# Altium PCB FinalPCB.PcbDoc (part 2 of 2)
Units mil, origin at the board's own origin, x right, y up, seen from the top; angles counter-clockwise.
Board outline 1128 x 1200 mil, 4 copper layers (Top Layer, Layer 1, Layer 2, Bottom Layer), stack 23.756 mil thick; 37 components, 46 nets, 236 pads, 59 vias.
Unrouted connection lines stored in the file: 12.
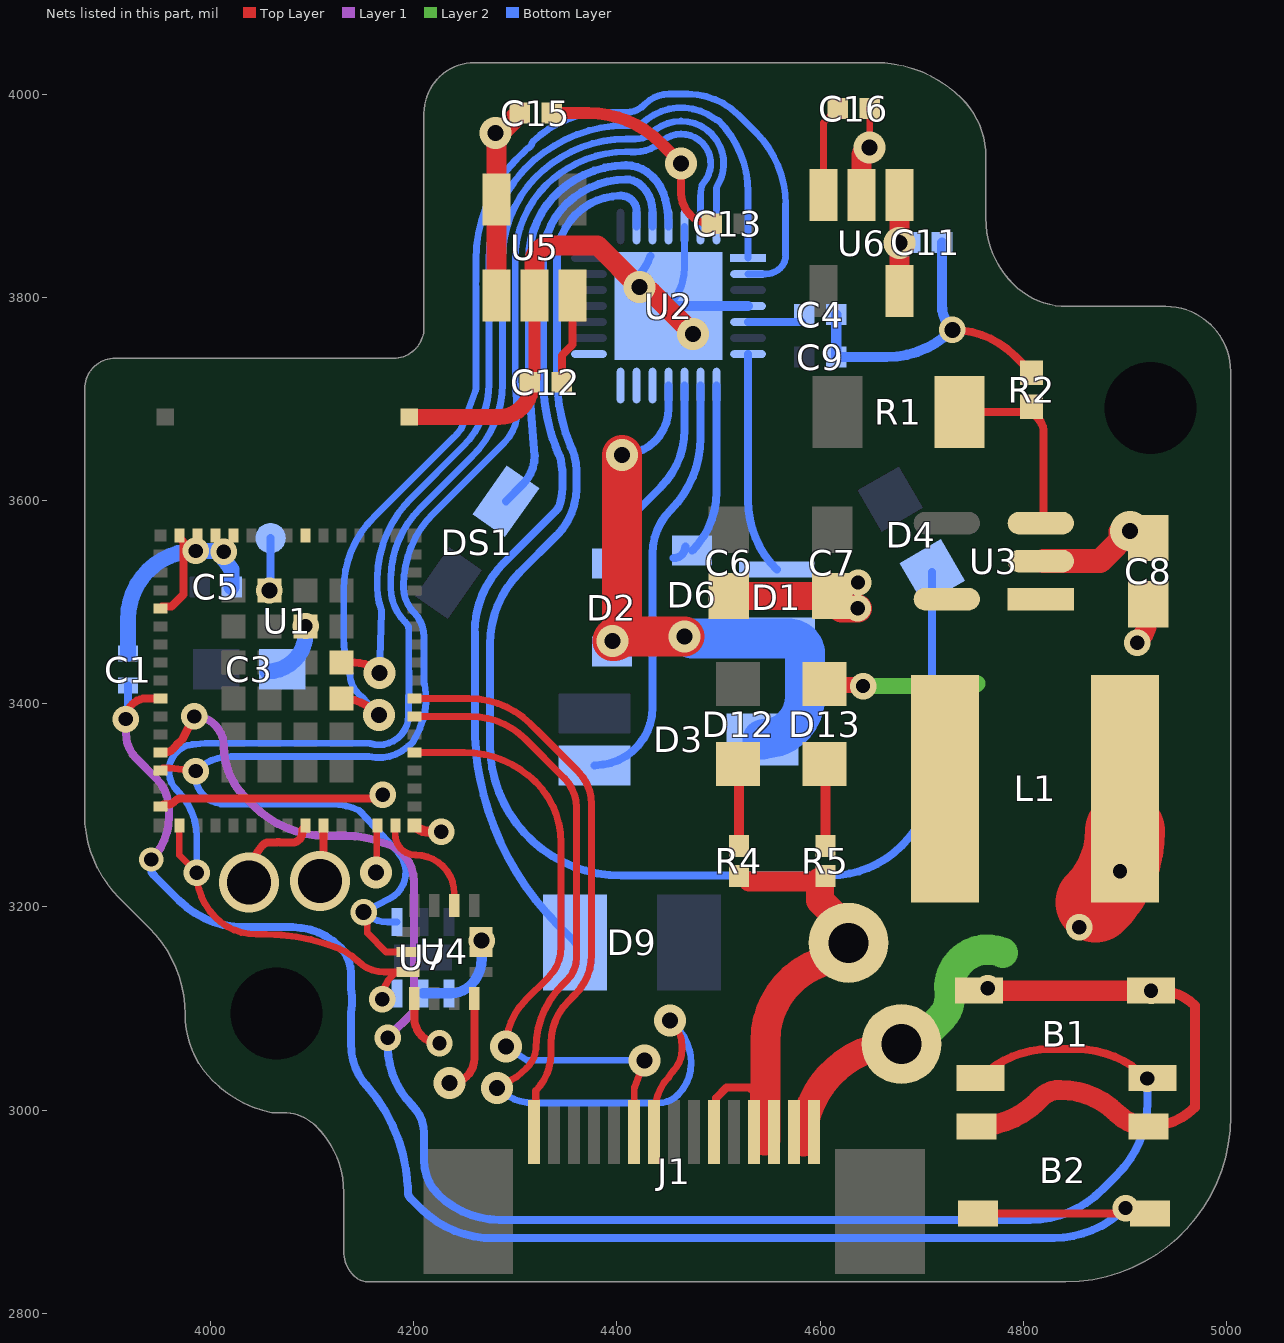
[diagram p4: the nets of this part, all layers, seen from the top]

## Via types
v1: diameter 26, hole 14, Top Layer to Bottom Layer, tented top, 22 vias
v2: diameter 31.5, hole 15.75, Top Layer to Bottom Layer, tented top, 16 vias
v3: diameter 26, hole 14, Top Layer to Bottom Layer, 5 vias
v4: diameter 26, hole 14, Top Layer to Bottom Layer, tented both sides, 4 vias
v5: diameter 31.5, hole 15.75, Top Layer to Bottom Layer, tented both sides, 3 vias
v6: diameter 26, hole 15.75, Top Layer to Bottom Layer, tented top, 3 vias
v7: diameter 59.06, hole 43.31, Top Layer to Bottom Layer, tented top, 2 vias
v8: diameter 59.06, hole 39.37, Top Layer to Bottom Layer, tented top, 1 vias
v9: diameter 24, hole 14, Top Layer to Bottom Layer, tented top, 1 vias
v10: diameter 26, hole 15.75, Top Layer to Bottom Layer, 1 vias
v11: diameter 39.37, hole 15.75, Top Layer to Bottom Layer, tented top, 1 vias

## Nets (pads, with @x,y where several pads share a name; then routed paths per layer and width w, separated by ;. In a path a pad name is that pad's centre, name@x,y a point inside that pad or via, vN(x,y) a via of type N, cw(c..) or ccw(c..) an arc to the next point about the centre after c; other vN are vias at no path point) (continued)
GND: B1.1 B1.2 B2.1 B2.2 C1.2 C3.2 C4.2 C5.2 C6.2 C7.2 C8.2 C9.2 C11.2 C12.2 C13.2 C15.2 C16.2 J1.10 J1.12 J1.13 pad.10@4627.85,3164.72 R2.2 R4.1 R5.1 U1.5 U1.16 U1.31 U1.57 U1.58 U1.59 U1.60 U1.84 U1.86 U2.4 U2.26 U2.29 U3.2 U4.1 U4.6 U4.7 U5.2 U6.2 U7.4 U7.5 | length 3359.8
  Top Layer w6.69: U6.2@4640.69,3900.61 U6.2@4648.75,3908.67 ; v2(4648.75,3947.24) C16.2@4648.75,3985.81
  Top Layer w7.87: U1.16@3950.46,3298.85 3953.41,3300.74 3957.35,3300.74 ccw(c3957.35,3310.66) 3964.79,3304.09 cw(c3970.66,3298.84) 3970.62,3306.71 v1@4169.4,3306.71 ; U1.5@3950.46,3493.73 3952.35,3495.62 3961.46,3495.62 3973.45,3507.61 3973.45,3559.32 3969.16,3563.61 U1.60@3969.16,3565.58 ; U4.1@4200.52,3109.89 4200.52,3090.54 ccw(c4225.29,3090.54) v1(4225.29,3065.77) ; v2(4463.22,3931.62) 4463.22,3902.37 ccw(c4493.27,3902.37) C13.2@4493.27,3872.32 ; J1.10@4495.64,2978.25 4497.61,2980.22 4497.61,3011.97 4507.87,3022.23 4530.4,3022.23 4535.01,3017.62 J1.12@4535.01,2978.25 ; v6(4730,3768) cw(c4730,3681.4) 4791.24,3742.63 R2.2@4808,3725.87
  Top Layer w9.84: v11(4905,3570) C8.2@4906.38,3570
  Top Layer w10: U1.31@4200.46,3280.15 ccw(c4215.3,3294.99) 4215.3,3274 v1(4227,3274) ; B2.2@4923.29,2983.92 ccw(c4923.29,3048.57) 4969,3002.86 4969,3102.79 ccw(c4933.46,3067.25) 4933.46,3117.51 v1(4925.72,3117.51)
  Top Layer w11.81: C12.2@4315.75,3714.23 ccw(c4307.95,3722.04) 4318.98,3722.04 U5.2@4318.98,3801.58 ; C15.2@4335.75,3981.28 4372.14,3981.28 cw(c4372.14,3881.28) 4442.85,3951.99 v2(4463.22,3931.62) ; v11(4905,3570) C8.2@4907.07,3572.07
  Top Layer w15.75: U1.86@4195.54,3682.12 4283.63,3682.12 ccw(c4283.63,3714.23) C12.2@4315.75,3714.23 ; v11@4891.46,3556.46 v11@4891.46,3570
  Top Layer w19.68: U5.2@4318.98,3801.58 4319,3836 cw(c4334,3836) 4334,3851 4381,3851 v2(4422,3810) cw(c4422,3793.1) 4433.94,3805.06 v2(4475,3764) ; 4530,3225 R5.1@4600,3225 ; U6.2@4640.69,3900.61 4640.69,3939.18 cw(c4648.75,3939.18) v2(4648.75,3947.24) ; B2.1@4754,2983.92 ccw(c4754,3068.24) 4813.62,3008.62 4817.08,3012.08 cw(c4836.2,2992.97) 4836.2,3020 cw(c4836.2,2940.8) 4892.2,2996.8 ccw(c4923.29,3027.9) B2.2@4923.29,2983.92
  Top Layer w20: B1.1@4756.43,3117.51 v1(4925.72,3117.51)
  Top Layer w23.62: U3.2@4819.97,3540.25 4875.25,3540.25 v11@4891.46,3556.46
  Top Layer w27.56: C6.2@4510,3505.96 C7.2@4611.67,3505.96 4611.67,3503.09 4620.84,3493.91 v1(4636.99,3493.91) ; R5.1@4600,3225 4600,3206.42 4627.85,3178.57 pad.10@4627.85,3164.72
  Top Layer w29.53: 4545,2970 ccw(c4545,2971) 4546,2971 4546,3068.18 cw(c4627.85,3068.18) 4607.93,3147.57 ccw(c4600.64,3176.19) pad.10@4627.85,3164.72
  Bottom Layer w7: U2.29@4450.73,3791.4 ccw(c4412.71,3829.41) 4466.48,3829.41 U2.26@4466.48,3869.68
  Bottom Layer w7.87: U2.29@4420,3820 ccw(c4381.98,3858.02) U2.29@4432.85,3840.59
  Bottom Layer w10: U7.5@4209,3114.96 U7.4@4234.59,3114.96 4236.59,3114.96 ccw(c4236.59,3142.41) 4256,3123 ccw(c4229.82,3149.18) 4266.84,3149.18 v6(4266.84,3166.72) ; U2.29@4450.73,3791.4 U2.4@4529.02,3791.4 ; C4.2@4615.75,3782.99 C9.2@4615.75,3741.15 4665.17,3741.15 ccw(c4665.17,3832.83) v6(4730,3768) cw(c4754.75,3792.75) 4719.75,3792.75 C11.2@4719.75,3854
  Bottom Layer w15.75: C1.2@3918.87,3449.21 3918.87,3483.91 cw(c3985.32,3483.91) v4(3985.32,3550.36) 4012.19,3550.36 cw(c4012.19,3549.51) v4(4013.03,3549.51) 4013.03,3542.12 4020.71,3531.98 cw(c4013.03,3531.25) 4020.75,3531.25 C5.2@4020.75,3515 ; C3.2@4056.17,3431.87 ccw(c4056.17,3469.16) 4093.46,3469.16 v3(4093.46,3476.47)
  Bottom Layer w27.56: v11@4905,3563.61 v11(4905,3570)
  other v1: 4765,3120 4169.45,3310.38 4637.28,3519.28
GPIO0: U1.72 U2.1 | length 935.8
  Top Layer w7.87: U1.72@4128.61,3440.58 4140.95,3440.58 cw(c4140.95,3404.91) v2(4166.17,3430.13)
  Bottom Layer w6.69: v2(4166.17,3430.13) 4168.33,3490.1 ccw(c4160.46,3490.41) 4167.85,3493.14 cw(c4224.14,3514.14) 4164.06,3514.14 4164.06,3522.32 cw(c4239.89,3522.32) 4164.07,3523.85 cw(c4277.32,3521.99) 4178.96,3578.16 cw(c4277.32,3521.99) 4197.22,3602.08 4248.54,3653.39 ccw(c4187.21,3714.72) 4272.54,3699.18 ccw(c4187.21,3714.72) 4273.94,3714.72 4273.94,3810.05 ccw(c4266.07,3810.01) 4273.87,3811.1 cw(c4287,3813) 4273.87,3814.91 ccw(c4266.07,3815.99) 4273.94,3815.95 4273.94,3836.96 cw(c4404,3837) 4298.53,3913.1 ccw(c4292.12,3917.67) 4298.58,3913.17 cw(c4381,3856.54) 4310.26,3927.21 4318.76,3935.72 ccw(c4315.73,3942.99) 4320.74,3936.91 cw(c4404,3837) 4337.85,3948.98 4338.14,3949.16 cw(c4409,3833.92) 4409,3969.2 cw(c4409,3894.27) 4414.6,3968.99 ccw(c4415.14,3976.84) 4416.63,3969.11 4421.81,3970.14 ccw(c4420.22,3977.85) 4422.96,3970.47 cw(c4427.68,3958.07) 4423.39,3970.62 ccw(c4420.78,3978.05) 4426.06,3972.22 cw(c4463.22,3931.62) 4427.05,3973.1 ccw(c4421.84,3979) 4427.14,3973.18 cw(c4444.75,3954.12) 4429.48,3975.1 ccw(c4424.81,3981.44) 4429.58,3975.18 cw(c4463.22,3931.62) 4496.14,3975.73 ccw(c4500.81,3982.07) 4499.73,3974.27 cw(c4429.02,3903.56) 4529.02,3903.56 U2.1@4529.02,3838.64
GPIO1: U1.71 U2.2 | length 1101.4
  Top Layer w7.87: U1.71@4128.61,3405.15 cw(c4128.61,3355.37) 4163.81,3390.57 v2(4165.74,3388.64)
  Bottom Layer w6.69: v2(4165.74,3388.64) 4160.23,3394.14 cw(c4231,3464.8) 4150.94,3404.88 ccw(c4145.59,3400.85) 4149.46,3406.32 cw(c4166.17,3430.13) 4137.08,3429.47 ccw(c4130.39,3429.28) 4136.72,3431.47 cw(c4231,3464.8) 4131,3464.8 4131,3512.36 cw(c4231,3512.36) 4160.29,3583.07 4239.54,3662.32 ccw(c4187.21,3714.72) 4246.15,3669.89 ccw(c4240.81,3673.92) 4247.07,3671.55 4260.7,3708.11 ccw(c4254.44,3710.48) 4261.12,3709.98 ccw(c4187.21,3714.72) 4261.27,3714.72 4261.27,3809.32 ccw(c4254.57,3809.28) 4261.23,3810.01 cw(c4287,3813) 4261.23,3815.99 ccw(c4254.57,3816.72) 4261.27,3816.68 4261.27,3836.92 cw(c4404,3837) 4288.17,3920.41 ccw(c4282.72,3924.29) 4288.21,3920.46 cw(c4381,3856.54) 4301.33,3936.22 4309.76,3944.64 cw(c4318.76,3935.72) 4312.69,3946.85 ccw(c4309.44,3952.7) 4313.65,3947.49 cw(c4404,3837) 4314.22,3947.96 ccw(c4309.98,3953.14) 4316.66,3952.66 cw(c4387.37,3881.95) 4387.37,3981.95 4409.1,3981.95 ccw(c4409.1,4006.74) 4426.63,3989.21 4427.76,3990.34 cw(c4451.09,3967.01) 4451.09,4000 4470,4000 cw(c4470,3929.99) 4519.51,3979.49 4536.71,3962.29 cw(c4466,3891.58) 4566,3891.58 4566,3841.07 cw(c4548.93,3841.07) 4561,3829 cw(c4546.25,3843.75) 4546.25,3822.89 U2.2@4529.02,3822.89
I2C3_SCL: U1.14 U2. U4.13 U7.1 | length 1549.2
  Top Layer w6.69: U1.14@3950.46,3334.28 3952.94,3336.76 3958.9,3336.76 cw(c3958.89,3330.07) 3959.69,3336.71 v1(3985.28,3333.65) ; v6(4150.57,3194.91) 4154.27,3191.21 4154.27,3174.16 4172.77,3155.66 U4.13@4194.12,3155.66
  Bottom Layer w6.69: v1@3987.64,3330.73 v1@3985,3333.37 ; U7.1@4183.41,3185.04 4174.39,3185.04 cw(c4174.39,3218.73) v6(4150.57,3194.91) 4176.3,3208.12 ccw(c4163,3234) 4184.38,3253.74 4147.36,3293.83 ccw(c4142.44,3289.29) 4147.17,3294.02 4146.35,3294.84 ccw(c4119.54,3239.54) 4119.54,3301 4014.73,3301 cw(c4014.73,3331.73) 3993,3310 cw(c4012.31,3329.31) 3985,3329.31 v1@3985,3333.37 ; 4301.94,3687.89 cw(c4258.6,3687.89) 4289.25,3657.24 4260.7,3628.7 4219.29,3587.28 ccw(c4290,3516.57) 4190,3516.57 4190,3514.14 ccw(c4224.14,3514.14) 4200,3490 cw(c4175.86,3465.86) 4210,3465.86 4210,3420.53 ccw(c4212.43,3420.53) 4210.71,3418.81 cw(c4136.93,3404.96) 4202.18,3367.85 4199.11,3362.48 cw(c4193.28,3365.78) 4197.34,3360.46 4194.51,3358.3 ccw(c4198.52,3352.94) 4194,3357.87 cw(c4165.74,3388.64) 4155.76,3348.08 4020.1,3348.08 ccw(c4020.1,3298.84) v1(3985.28,3333.65) v1@3985,3333.37 ; 4301.94,3687.93 4301.69,3690.89 4301.03,3698.75 ccw(c4294.36,3698.25) 4301.02,3698.9 4300.99,3699.21 cw(c4521.76,3721.24) 4299.89,3721.32 4299.89,3837 cw(c4404,3837) 4330.89,3911.12 cw(c4404,3837) 4351.25,3926.76 ccw(c4347.83,3932.51) 4351.32,3926.8 cw(c4409,3833.92) 4409,3943.25 cw(c4409,3894.27) 4413.69,3943.03 ccw(c4414.29,3949.69) 4414.26,3943 4417.89,3943 ccw(c4417.89,3980.98) 4442.39,3951.96 ccw(c4438.04,3957.05) 4442.73,3952.27 cw(c4463.22,3931.62) 4444.39,3953.79 ccw(c4440.02,3958.87) 4444.75,3954.12 ccw(c4441.02,3959.68) 4445.14,3954.41 cw(c4463.22,3931.62) 4484.94,3912.26 ccw(c4489.96,3907.83) 4483.44,3909.33 ccw(c4532.66,3898.34) 4482.23,3898.34 U2.@4482.23,3869.68
I2C3_SDA: U1.18 U2.28 U4.14 U7.6 | length 1579.8
  Top Layer w6.69: U1.18@3969.16,3280.15 3969.16,3250.9 v1(3986.35,3233.71) ccw(c4048.5,3233.71) 4004.53,3189.79 ccw(c4045.03,3230.24) 4045.03,3173 4054.72,3173 cw(c4054.75,2984.07) 4127.05,3158.62 cw(c4106.36,3108.66) 4144.63,3146.87 ccw(c4170.97,3173.26) 4170.97,3135.97 4182.55,3135.97 ; v1(4169,3109) cw(c4201.42,3109) 4178.5,3131.93 4182.55,3135.97 ; U4.14@4194.12,3135.97 4182.55,3135.97
  Bottom Layer w6.69: v1(3986.35,3233.71) 3986.35,3268.99 ccw(c3922.83,3268.99) 3967.75,3313.91 ccw(c3962.59,3309.64) 3967.2,3314.49 cw(c3985.28,3333.65) 3972.43,3356.65 ccw(c3969.13,3362.48) 3973.32,3357.26 cw(c3978.69,3350.65) 3978.69,3359.16 3978.84,3359.2 cw(c3985,3335.86) 3985,3360 3994.81,3361.11 4155.31,3361.11 cw(c4155.27,3354.41) 4157.2,3360.82 ccw(c4165.74,3388.64) 4165.74,3359.54 ccw(c4165.74,3388.64) 4194.83,3388.33 4195.26,3429.83 ccw(c4166.17,3430.13) 4195.03,3433.86 cw(c4201.67,3434.67) 4194.98,3434.64 4194.98,3473.86 ccw(c4188.28,3473.85) 4193.93,3477.44 ccw(c4175.86,3465.86) 4191.06,3481.02 cw(c4224.14,3514.14) 4187.89,3484.51 cw(c4224.14,3514.14) 4177.32,3514.14 4177.32,3522.32 cw(c4239.89,3522.32) 4177.33,3523.55 cw(c4277.32,3521.99) 4206.61,3592.7 4257.92,3644.01 ccw(c4187.21,3714.72) 4287.21,3714.72 4287.21,3814.64 ; 4287,3813 ccw(c4280.52,3814.67) 4287.21,3814.64 ; U2.28@4497.98,3869.68 4497.98,3906.53 cw(c4504.67,3906.5) 4498.93,3909.94 ccw(c4463.22,3931.62) 4437.54,3964.56 cw(c4433.47,3969.87) 4437.4,3964.45 ccw(c4444.75,3954.12) 4436.06,3963.35 cw(c4431.5,3968.26) 4435.9,3963.22 ccw(c4463.22,3931.62) 4434.35,3961.81 cw(c4429.76,3966.68) 4433.61,3961.2 4430.74,3959.21 cw(c4426.95,3964.72) 4427.68,3958.07 cw(c4423.38,3963.2) 4425.4,3956.82 cw(c4417.89,3980.98) 4417.89,3955.68 4414.83,3955.68 cw(c4414.86,3962.37) 4414.33,3955.7 ccw(c4409,3894.27) 4409,3955.93 ccw(c4409,3833.92) 4344.76,3937.65 cw(c4341.27,3943.36) 4344.7,3937.61 ccw(c4404,3837) 4287.21,3837 4287.21,3814.64
LEDX1: D9.1 U2.24 | length 920
  Bottom Layer w7.87: D9.1@4358.9,3165.17 4344.14,3179.93 4341.87,3182.2 cw(c4539.62,3379.89) 4265.2,3326.22 ccw(c4257.48,3324.67) 4265.14,3326.49 cw(c4404.38,3360.1) 4261.35,3352.4 ccw(c4253.49,3351.93) 4261.33,3352.69 4261.16,3354.46 cw(c4269,3355.2) 4261.15,3354.52 4261.11,3354.97 cw(c4539.62,3379.89) 4260,3379.98 4260,3470 cw(c4356.57,3470) 4288.28,3538.28 4339.77,3589.77 ccw(c4326.11,3603.43) 4342.24,3592.79 ccw(c4335.65,3597.1) 4343.01,3594.3 ccw(c4294.95,3611.94) 4345.43,3603.43 ccw(c4294.95,3611.94) 4346.14,3611.94 4346.14,3629.54 ccw(c4305.64,3629.61) 4346.14,3630.14 ccw(c4338.27,3630.01) 4346.07,3631.08 4345.06,3638.7 ccw(c4337.25,3637.69) 4344.9,3639.57 ccw(c4305.64,3629.61) 4343.69,3643.5 ccw(c4336.3,3640.77) 4343,3644.91 cw(c4361.59,3656.17) 4341.57,3647.71 4341.51,3647.84 cw(c4521.76,3721.24) 4339.51,3652.96 cw(c4521.76,3721.24) 4334.86,3666.96 cw(c4521.76,3721.24) 4327.14,3721.32 4327.14,3837 cw(c4404,3837) 4344.79,3886 cw(c4404,3837) 4365.31,3903.41 ccw(c4361.31,3910.19) 4365.45,3903.5 cw(c4409,3833.92) 4409,3916 cw(c4409,3894.27) 4424.36,3909.64 4425,3909 cw(c4400.9,3884.9) 4434.98,3884.9 U2.24@4434.98,3869.68
LEDX2: DS1.2 U2.25 | length 478.1
  Bottom Layer w8: DS1.2@4290.61,3599.31 4307.48,3616.18 ccw(c4279.66,3644) 4319,3644 ; 4319,3644.04 4314.3,3699.98 ccw(c4306.33,3699.34) 4314.29,3700.12 4314.27,3700.34 cw(c4521.76,3721.24) 4313.22,3721.32 4313.22,3837 cw(c4404,3837) 4337.41,3898.7 cw(c4404,3837) 4358.12,3915.33 ccw(c4354.05,3922.22) 4358.25,3915.41 cw(c4409,3833.92) 4409,3929.92 cw(c4409,3894.27) 4434.24,3919.44 4434.8,3918.89 cw(c4400.9,3884.9) 4447.48,3896.52 ccw(c4455.23,3898.51) 4447.52,3896.37 cw(c4366.29,3873.29) 4450.73,3873.29 U2.25@4450.73,3869.68
LEDX3: D4.1 U2.23 | length 1410.3
  Bottom Layer w7.87: 4341,3721.24 ccw(c4521.76,3721.24) 4354.31,3653.16 ccw(c4361.59,3656.17) 4354.89,3652.03 4355.47,3651.1 cw(c4348.77,3646.95) 4356.08,3649.89 cw(c4305.64,3629.61) 4360,3629.61 4360,3611.94 cw(c4294.95,3611.94) 4340.95,3565.95 4304.29,3529.29 ccw(c4375,3458.58) 4275,3458.58 4275,3360.1 ccw(c4404.38,3360.1) 4404.38,3230.71 4609.29,3230.71 ccw(c4609.29,3330.71) 4680,3260 4680.98,3260.98 ccw(c4610.27,3331.69) 4710.27,3331.69 D4.1@4710.27,3529.77 ; 4341,3721.28 4341,3837 cw(c4404,3837) 4404,3900 cw(c4404,3884.76) 4419.24,3884.76 U2.23@4419.24,3869.68
LX: L1.1 U3.5
MPUInt1: U1.29 U4.4 | length 145.5
  Top Layer w6.69: v2(4163,3234) 4163.52,3234.52 4163.52,3279.62 U1.29@4164.04,3280.15
  Top Layer w8: v2(4235.27,3026.44) ccw(c4235.27,3050.75) 4259.58,3050.75 U4.4@4259.58,3109.89
  Bottom Layer w6.69: v2(4163,3234) v2@4164.15,3235.15
MPUInt2: U1.30 U4.9 | length 111.9
  Top Layer w6.69: U1.30@4181.76,3280.15 4181.76,3271.24 ccw(c4202,3271.24) 4202,3251 cw(c4202,3213.11) 4239.89,3213.11 U4.9@4239.89,3201.43
NetC4_1: C4.1 U2.5 | length 53.2
  Bottom Layer w7.87: U2.5@4529.02,3775.65 C4.1@4582.2,3775.65
NetC12_1: C12.1 U5.3 | length 89.7
  Top Layer w7.87: C12.1@4345.65,3716.38 4345.65,3742.79 4356.38,3753.52 U5.3@4356.38,3801.58
NetC16_1: C16.1 U6.3 | length 91
  Top Layer w6.69: U6.3@4603.29,3900.61 4603.29,3971.85 C16.1@4617.25,3985.81
NetD12_1: D12.1 R4.2 | length 81.2
  Top Layer w9.84: D12.1@4519.25,3340.63 4520,3339.88 R4.2@4520,3259.76
NetD13_1: D13.1 R5.2 | length 81.1
  Top Layer w9.84: D13.1@4604.46,3340.63 4605,3340.09 R5.2@4605,3259.76
NetR1_1: R1.1 R2.1 U3.3 | length 199.9
  Top Layer w7.87: R1.1@4721.63,3687.07 4799.77,3687.07 4812.7,3683.95 4812.7,3682.39 cw(c4799.77,3666.87) 4819.97,3666.87 U3.3@4819.97,3577.65
PD1: D1.2 U2.7 | length 219.8
  Bottom Layer w7.87: U2.7@4529.02,3744.15 4529.02,3600.17 ccw(c4625.6,3600.17) D1.2@4557.31,3531.88
PD2: D6.A U2.8 | length 187
  Bottom Layer w7.87: D6.A@4455.7,3543.31 ccw(c4455.7,3554.85) D6.A@4467.24,3554.85 ; D6.A@4474.05,3550.68 ccw(c4416.3,3608.43) 4497.98,3608.43 U2.8@4497.98,3713.11
PD3: D3.3 U2.9 | length 418.9
  Bottom Layer w7.87: D3.3@4378.03,3339.36 ccw(c4378.03,3396.33) 4435,3396.33 4435,3547.54 cw(c4496.46,3547.54) 4453,3591 ccw(c4382.44,3661.56) 4482.23,3661.56 U2.9@4482.23,3713.11
PD4: D2.A U2.10 | length 198.7
  Bottom Layer w7.87: D2.A@4394.85,3537.85 cw(c4460.05,3537.85) 4413.95,3583.95 4443,3613 ccw(c4386.31,3669.69) 4466.48,3669.69 U2.10@4466.48,3713.11
PD5: U2.12
PD6: U2.13
PD7: U2.14
PD8: U2.15
PDC: D1.1 D2.K D3.1 D6.K U2.11 | length 583.5
  Top Layer w39.37: v2(4405,3645) 4405,3470.93 cw(c4395.73,3470.93) v2@4403.68,3466.17 ; v2(4466.56,3466.17) v2@4403.68,3466.17 ; v2@4403.68,3466.17 cw(c4395.73,3470.93) v2(4395.73,3461.66) cw(c4400.24,3461.66) 4400.24,3466.17 v2@4403.68,3466.17
  Bottom Layer w7.87: v2(4405,3645) ccw(c4405,3690.73) 4450.73,3690.73 U2.11@4450.73,3713.11
  Bottom Layer w39.37: D6.K@4474.05,3464.06 4570.01,3464.06 cw(c4570.01,3449.07) 4585,3449.07 4585,3406.57 cw(c4543.38,3406.57) 4559.21,3368.08 4559.13,3368.08 D3.1@4543.38,3364.95
PH3-BOOT0: B1.3 B1.4 U1.13 | length 1657.9
  Top Layer w7.87: U1.13@3950.46,3352 3952,3352 3953.41,3352.03 3953.47,3352.03 ccw(c3952,3385) 3958.27,3352.6 ccw(c3956.74,3360.32) 3962.42,3354.87 3963.3,3355.8 cw(c3968.99,3350.34) 3963.81,3356.28 ccw(c3957.35,3363.81) 3965.76,3358.54 cw(c3972.39,3354.3) 3967.15,3360.17 cw(c3985,3340) 3969.15,3361.78 3969.56,3362.19 3972.16,3364.79 v1(3983.89,3387.45)
  Top Layer w8: B1.3@4757.6,3031.69 cw(c4825.95,2963.34) 4825.95,3060 4851.99,3060 cw(c4851.99,2960.99) v3(4922,3031)
  Layer 1 w8: v1(3983.89,3387.45) cw(c3983.89,3358.35) 4013,3358.35 ccw(c4083.85,3358.35) 4033.75,3308.25 4042.71,3299.29 ccw(c4113.42,3370) 4113.42,3270 4132.99,3270 cw(c4132.99,3170.99) 4168.97,3263.23 cw(c4161.2,3225.17) 4200.04,3225.17 4200.04,3097.08 v1(4174.27,3071.31)
  Bottom Layer w8: v1(4174.27,3071.31) 4174.27,3063.71 ccw(c4258.71,3063.71) 4199,3004 cw(c4172.44,2977.44) 4210,2977.44 4210,2950.8 ccw(c4257.8,2950.8) 4224,2917 ccw(c4284.36,2977.36) 4284.36,2892 4806.58,2892 ccw(c4806.58,2992) 4877.29,2921.29 4892.71,2936.71 ccw(c4822,3007.42) 4922,3007.42 v3(4922,3031)
RST_BUT: B2.3 B2.4 C1.1 U1.10 | length 1616.3
  Top Layer w7.87: v4(3916.58,3384.84) cw(c3936.89,3384.84) 3936.89,3405.15 U1.10@3950.46,3405.15 ; B2.3@4755.17,2898.11 B2.4@4924.46,2898.11
  Layer 1 w7.87: v4(3916.58,3384.84) 3916.58,3371.16 ccw(c3952.16,3371.16) 3927,3346 3946.1,3326.9 cw(c3914.96,3295.76) 3959,3295.76 3959,3288.51 cw(c3899.83,3288.51) v9(3941.67,3246.68)
  Bottom Layer w7.87: v4(3916.58,3384.84) ccw(c3916.58,3387.13) 3918.87,3387.13 C1.1@3918.87,3417.71 ; v9(3941.67,3246.68) 3941.67,3237.05 ccw(c3949.97,3237.05) 3944.09,3231.19 3968.75,3206.53 ccw(c4032.87,3270.75) 4032.87,3180 4080.58,3180 cw(c4080.58,3113.8) 4127.39,3160.61 cw(c4101.78,3135) 4138,3135 4138,3121.38 ccw(c4145.87,3121.41) 4138.18,3119.76 cw(c4084.2,3107.83) 4138.18,3095.91 ccw(c4145.87,3094.25) 4138,3094.29 4138,3065.5 ccw(c4202.05,3065.5) 4150.01,3028.16 4150.05,3028.1 ccw(c4156.36,3032.81) 4150.63,3027.42 4151.09,3026.93 cw(c4119.73,2997.06) 4153.21,3024.54 4156.76,3020.21 4160.72,3015.38 cw(c4127.24,2987.91) 4163.25,3011.97 4169.83,3002.12 cw(c4133.83,2978.06) 4172.02,2998.47 4177.6,2988.02 cw(c4139.41,2967.61) 4179.42,2984.18 4183.95,2973.24 cw(c4143.94,2956.67) 4185.39,2969.24 4188.82,2957.9 cw(c4147.38,2945.33) 4189.86,2953.78 4192.15,2942.25 cw(c4149.69,2933.71) 4192.79,2937.96 4193.95,2926.17 cw(c4150.85,2921.92) 4194.15,2922.99 4194.25,2918.77 ccw(c4202.12,2918.99) 4197.39,2912.7 4206.85,2903.23 ccw(c4277.51,2974) 4269.43,2874.33 4269.5,2874.32 ccw(c4270,2882.18) 4269.96,2874.31 4829.89,2874.31 ccw(c4829.89,2974.31) v3(4900.6,2903.6)
SCK: U1.26 | length 56.6
  Top Layer w7.87: v7(4107.74,3225.31) ccw(c4107.74,3228.47) 4110.89,3228.47 U1.26@4110.89,3280.15
SPIMISO: J1.07 U1.37 | length 896.1
  Top Layer w6.69: U1.37@4200.46,3387.43 4255.85,3387.43 cw(c4255.85,3310.85) 4310,3365 cw(c4254.47,3309.47) 4310.71,3364.28 ; v2(4282,3022) 4301.77,3032.97 4310.59,3040.89 ccw(c4291.15,3062.53) 4320.17,3060.48 ; J1.07@4436.58,2978.25 4436.58,2993.54 4437.93,3006.4 4437.93,3006.49 cw(c4499.46,2993.54) 4445.72,3026.18 cw(c4451.44,3022.7) 4446.88,3027.6 ccw(c4427.15,3048.99) 4452.93,3035.5 cw(c4458.84,3032.35) 4454,3036.98 cw(c4499.46,2993.54) 4455,3038 ccw(c4433.27,3059.73) 4464,3059.73 4464,3063 ccw(c4432.62,3063) 4454.81,3085.19 v5(4452,3088)
  Top Layer w7: 4310.02,3364.98 4347.98,3327.02 cw(c4318.96,3298) 4360,3298 4360,3149.73 cw(c4329.27,3149.73) 4351,3128 4346.11,3123.11 ccw(c4408.74,3060.48) 4320.17,3060.48
  Bottom Layer w6.69: v2(4282,3022) ccw(c4318.21,3058.21) 4318.21,3007 4440.69,3007 ccw(c4440.69,3034.31) 4460,3015 ccw(c4428.62,3046.38) 4473,3046.38 ccw(c4423.23,3046.38) v5@4458.43,3081.57 ; v5(4452,3088) v5@4458.42,3081.58
SPIMOSI: J1.01 U1.38 | length 590.4
  Top Layer w6.69: U1.38@4200.46,3405.15 4254.29,3405.15 cw(c4254.29,3319.29) 4315,3380 4320.71,3374.29 ; J1.01@4318.47,2978.25 J1.01@4318.47,3006.62
  Top Layer w7: J1.01@4318.47,2978.25 ccw(c4314.79,2981.94) 4320,2981.94 4320,3019 ccw(c4283.79,3055.21) 4335,3055.21 4335,3066 cw(c4392.94,3066) 4351.97,3106.97 4359,3114 ccw(c4320.37,3152.63) 4375,3152.63 4375,3301 ccw(c4329.13,3301) 4361.56,3333.44 4320.71,3374.29
SPISCK: J1.06 U1.35 | length 625.1
  Top Layer w6.69: U1.35@4200.46,3352 4249.58,3352 cw(c4249.58,3252) 4320.29,3322.71 cw(c4260.64,3263.06) 4345,3263.06 4345,3160.61 cw(c4302.61,3160.61) 4332.59,3130.64 4309.64,3107.69 ccw(c4354.8,3062.54) v2(4290.94,3062.54) ; J1.06@4416.9,2978.25 4416.9,3020.39 cw(c4423.59,3020.39) 4417.32,3022.71 v5(4427.15,3048.99)
  Bottom Layer w6.69: v2(4290.94,3062.54) 4311.39,3049 4398.02,3049 v5(4427.15,3048.99)
SWDIO: U1.25 | length 93.7
  Top Layer w7.87: v7(4038.01,3224.18) 4038.01,3224.98 cw(c4093.18,3224.98) 4051.03,3260.57 cw(c4057.02,3255.46) 4056.98,3263.34 4062.67,3263.34 ccw(c4062.67,3273.26) 4064.88,3263.59 cw(c4066.6,3255.9) 4068.33,3263.59 ccw(c4070.54,3273.26) 4070.54,3263.34 4080.38,3263.34 ccw(c4080.38,3273.26) 4090.3,3273.26 4090.3,3274.06 cw(c4098.18,3274.06) 4090.95,3277.18 4092.19,3277.19 U1.25@4093.18,3280.15
Test1: pad.15 U1.76 | length 51.9
  Bottom Layer w7.87: v10(4057.75,3511.45) ccw(c4054.72,3514.48) 4059,3514.48 pad.15@4059,3563
Test2: U1.53
Vin: C8.1 C11.1 C15.1 D13.2 J1.14 J1.15 L1.2 pad.10@4680,3065 U3.1 U5.1 U5.5 U6.1 U6.5 | length 875.5
  Top Layer w15.75: D13.2@4604.46,3419.37 4605.49,3418.34 4641.15,3418.34 v1(4642.18,3417.31)
  Top Layer w19.68: U5.1@4281.58,3801.58 U5.5@4281.58,3896.07 4281.58,3958.6 C15.1@4304.25,3981.28 ; U6.5@4678.09,3806.12 U6.1@4678.09,3900.61 ; v1(4912,3460) ccw(c4885.44,3486.56) 4923,3486.56 C8.1@4923,3498.04
  Top Layer w27.56: 4583.34,2968.34 cw(c4680,2968.34) pad.10@4680,3065 pad.10@4670.21,3055.21
  Top Layer w78.74: 4870.87,3204.13 ccw(c4800.16,3274.84) L1.2@4900.16,3274.84
  Layer 2 w15.75: v1(4642.18,3417.31) 4748.5,3417.31 ccw(c4748.5,3426.5) 4755,3420
  Layer 2 w30: pad.10@4680,3065 ccw(c4680,3097.7) 4703.13,3074.58 4718.7,3090.15 ccw(c4697.54,3111.42) 4727.31,3115.15 cw(c4765,3120) 4779.54,3155.11
  other v2: 4678.09,3853.36 4280.63,3961.78
  other v3: 4855,3180 4895,3235
pads on no net: D3.2 J1.S1 J1.S2 U1.1 U1.2 U1.3 U1.7 U1.8 U1.9 U1.11 U1.12 U1.19 U1.20 U1.21 U1.22 U1.23 U1.24 U1.27 U1.28 U1.33 U1.34 U1.36 U1.43 U1.44 U1.45 U1.46 U1.47 U1.49 U1.50 U1.51 U1.52 U1.54 U1.55 U1.56 U1.61 U1.62 U1.63 U1.64 U1.65 U1.66 U1.67 U1.68 U1.69 U1.70 U1.73 U1.74 U1.75 U1.77 U1.78 U1.79 U1.80 U1.81 U1.82 U1.83 U1.85 U2.16 U2.17 U2.18 U2.19 U2.20 U2.21 U2.22 U4.2 U4.3 U4.10 U4.11 U4.12 U7.2 U7.7

## Polygon pours and split planes (outlines as drawn)
3V3 on Layer 2 "NONET_L-01_P-001" (solid, pour order 8): 3893.85,3235.61 cw(c4455.2,3410.18) 3876.42,3513.18 3877.44,3515.1 3892.53,3571.09 3892.53,3709.21 cw(c3924.69,3709.21) 3924.69,3741.37 4180.54,3741.37 ccw(c4180.54,3768.35) 4207.53,3768.35 4207.53,3978.35 cw(c4260.54,3978.35) 4260.54,4031.37 4595.28,4031.37 4597.53,4032.37 4769.54,4032.37 cw(c4769.54,3908.64) 4857.03,3996.13 5007.32,3845.84 cw(c4919.83,3758.35) 5043.56,3758.35 5043.56,2981.81 cw(c4979.09,2981.81) 5024.68,2936.22 4907.65,2819.19 cw(c4864.54,2862.29) 4864.54,2801.34 4233.54,2801.34 cw(c4233.54,2925.06) 4146.06,2837.58 3984.04,2999.59 3981.95,3001.08 cw(c4477.21,3323.95)
Vin on Layer 2 "NONET_L-01_P-001" (solid, pour order 6): 4460,3791.99 cw(c4460,3745) 4506.98,3745 ccw(c4540,3745) 4540,3711.99 4670,3711.99 cw(c4670,3665) 4716.98,3665 4716.98,3145 ccw(c4760,3145) 4760,3101.99 4895,3101.99 ccw(c4895,3189.5) 4956.88,3127.62 4985.47,3156.21 4985.58,3156.33 ccw(c4976.8,3164.64) 4988.87,3163.93 ccw(c4455.67,3411.88) 5043.71,3411.88 ccw(c4455.67,3411.89) 4894.65,3803.15 4894.53,3803.27 4699.14,3998.66 ccw(c4611.65,3911.17) 4611.65,4034.9 4260.67,4034.9 ccw(c4260.67,3981.88) 4207.66,3981.88 4207.66,3829.33 ccw(c4245,3829.33) 4245,3791.99
GND on Bottom Layer "NONET_L-01_P-001" (solid, pour order 9): 4790,3629 4945,3629 cw(c4945,3590) 4984,3590 4984,2981 cw(c4884,2981) 4884,2881 4775,2881 cw(c4775,2930) 4726,2930 4726,3564 cw(c4790,3564) 4790,3628
GND on Layer 1 "NONET_L-01_P-001" (solid, pour order 7): 3893.3,3235.25 cw(c4454.66,3409.83) 3875.88,3512.83 3876.89,3514.74 3891.99,3570.74 3891.99,3708.86 cw(c3924.14,3708.86) 3924.14,3741.01 4180,3741.01 ccw(c4180,3768) 4206.98,3768 4206.98,3978 cw(c4260,3978) 4260,4031.01 4594.74,4031.01 4596.98,4032.01 4769,4032.01 cw(c4769,3908.29) 4856.49,3995.78 5006.78,3845.49 cw(c4919.29,3758) 5043.02,3758 5043.02,2981.46 cw(c4978.54,2981.46) 5024.13,2935.87 4907.1,2818.84 cw(c4864,2861.94) 4864,2800.99 4233,2800.99 cw(c4233,2924.71) 4145.51,2837.22 3983.5,2999.23 3981.41,3000.72 cw(c4476.67,3323.6)

## Keep-outs
Keep-Out Layer:
  region: 3910,3730 4215,3730 4215,3585 3910,3585

## Other copper
Top Layer:
  region net 3V3: 4496.56,3553 cw(c4496.56,3590.56) 4470,3564 4470,3613 cw(c4490,3613) 4490,3633 4563,3633 ccw(c4563,3658) 4588,3658 4588,3710 cw(c4612,3710) 4612,3734 4650,3734 cw(c4650,3709) 4675,3709 4675,3644 ccw(c4693,3644) 4693,3626 4741,3626 cw(c4741,3607) 4760,3607 4760,3570 cw(c4743,3570) 4743,3553
  region net Vin: 4787.38,3514.22 4787.38,3493.55 ccw(c4811.86,3493.55) 4794.55,3476.24 4805.73,3465.05 ccw(c4830,3489.32) 4830,3455 4830.86,3455 cw(c4830.86,3420.87) 4855,3445 4859.38,3440.62 cw(c4839.59,3420.82) 4867.58,3420.82 4868.74,3419.67 ccw(c4880,3430.93) 4880,3415 4926.3,3415 ccw(c4926.3,3423.93) 4932.61,3417.61 4932.61,3430.43 ccw(c4915.82,3430.43) 4927.69,3442.31 4890.85,3479.15 cw(c4906.23,3494.53) 4884.48,3494.53 ccw(c4853.36,3488.24) 4871.61,3514.21
  region net GND: 3970.35,3571.89 3970.35,3549.53 4025.88,3549.53 4025.88,3572.38
  region net LX: 4760,3510 4760,3205 4750,3195 4690,3195 4680,3205 4680,3485 4705,3510

## Silkscreen, mask and mechanical layers (free items; w line width, h text height)
Top Overlay:
  circle w9.84: c3941.06,3544.87 r4.92
Bottom Overlay:
  drawing of 6 lines, arcs and shapes, not listed
  text "PD15" at 3965.88,3611.69 h59.06
Mechanical 1:
  circle w3.94: c4068.22,3095.4 r68.9
  circle w3.94: c4923.06,3691.53 r68.9
  lines w6: 4170,3740 4180,3740 ; 4210,3980 4210,3981
  lines w6.69: 4170,3740 3924.14,3740 3906,3740 ccw(c3906,3710) 3876,3710 3876,3291 ccw(c3991.88,3291) 3909.94,3209.06 3939.64,3179.36 cw(c3854.29,3094) 3975,3094 ccw(c4066.74,3094) 4001.87,3029.13 ccw(c4084.27,3111.53) 4060.26,2997.5 4071.41,2997.5 cw(c4071.41,2951.41) 4104,2984 cw(c4038.82,2918.82) 4131,2918.82 4131,2861.14 ccw(c4165.14,2861.14) 4141,2837 ccw(c4155.49,2851.49) 4155.49,2831 4185,2831 4841.58,2831 ccw(c4841.58,2993.42) 5004,2993.42 5004,3727 ccw(c4940,3727) 4940,3791 4843.11,3791 cw(c4843.11,3866.11) 4790,3813 cw(c4855.18,3878.18) 4763,3878.18 4763,3938.56 ccw(c4682.27,3938.56) 4739.36,3995.64 ccw(c4654,3910.29) 4654,4031 4596.98,4031 4260,4031 ccw(c4260,3981) 4210,3981 ; 4180,3740 ccw(c4180,3770) 4210,3770 4210,3980
Top Assembly:
  lines w6: 4454.66,3411.83 4927.92,2938.57
  lines w7: 4453.98,3279.48 ccw(c4454.66,3411.83) 4539.73,3513.22